# EAGLE board thermistor_board (EAGLE 7.5.0)
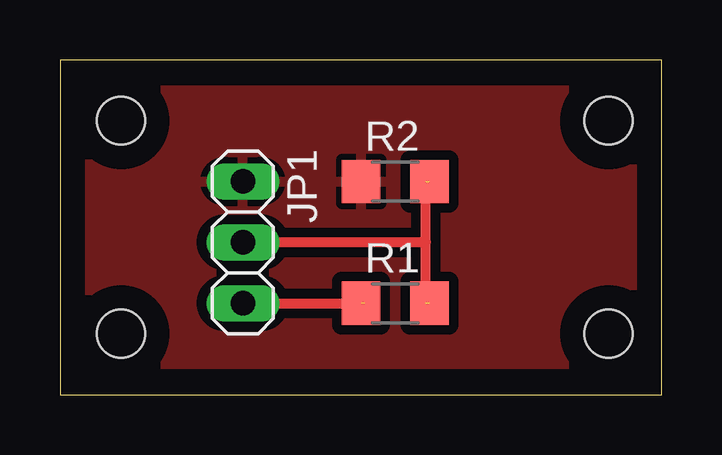
[diagram p0: board, top side]

Size 25.07 x 13.96 mm. Coordinates in mm from the lower left corner, seen from the top.
Outline: 0,0 25.07,0 25.07,13.96 0,13.96 0,0
Copper layers (1*16): Top 0.035mm / dielectric 1.5mm / Bottom 0.035mm
Design rules "default": minimum track width 10mil, minimum drill 24mil, track to track 8mil, track to pad 8mil, pad to pad 8mil, via to via 8mil, smd to smd 8mil, copper to edge 40mil, drill to drill 8mil, minimum pad ring 10mil, minimum via ring 8mil, stop-mask expansion 4mil, vias tented up to drill 0mil, thermal gap 10mil
Holes 2 mm at 22.86,11.43 22.86,2.54 2.54,2.54 2.54,11.43

## Footprints (pad centres in the part's own frame; a part is rotated, then mirrored left to right if it is on the bottom)
1X03 = drill 1.016 long: 1 -2.54,0; 2 0,0; 3 2.54,0
R1206 = smd 1.6 x 1.803: 1 -1.422,0; 2 1.422,0

## Placement (x,y rotation side)
JP1  [1X03]  7.62,6.35 270 top
R1  [R1206]  13.97,3.81 0 top
R2  [R1206]  13.97,8.89 0 top

## Library data of the parts
JP1 = pinhead
R1 R2 = fab

## Nets
GND: JP1.1 R2.1
N$1: JP1.3 R1.1
N$2: JP1.2 R1.2 R2.2

## Tracks (layer width: path | path; a pad name or v marks a point on that pad's centre or on a via)
GND
  pour Top (isolate 0.406): 1.27,12.7 24.13,12.7 24.13,1.27 1.27,1.27
N$1  (1 unrouted)
  Top 0.406: JP1.3 12.7,3.81
N$2  (2 unrouted)
  Top 0.406: 15.24,3.81 15.24,6.35 | 15.24,6.35 15.24,8.89 | 15.24,6.35 JP1.2